# Altium PCB PCB1.PcbDoc
Units mil, origin at the board's own origin, x right, y up, seen from the top; angles counter-clockwise.
Board outline 1968.5 x 1968.5 mil, 2 copper layers (Top Layer, Bottom Layer); 15 components, 16 nets, 48 pads, 0 vias.
Unrouted connection lines stored in the file: 34.
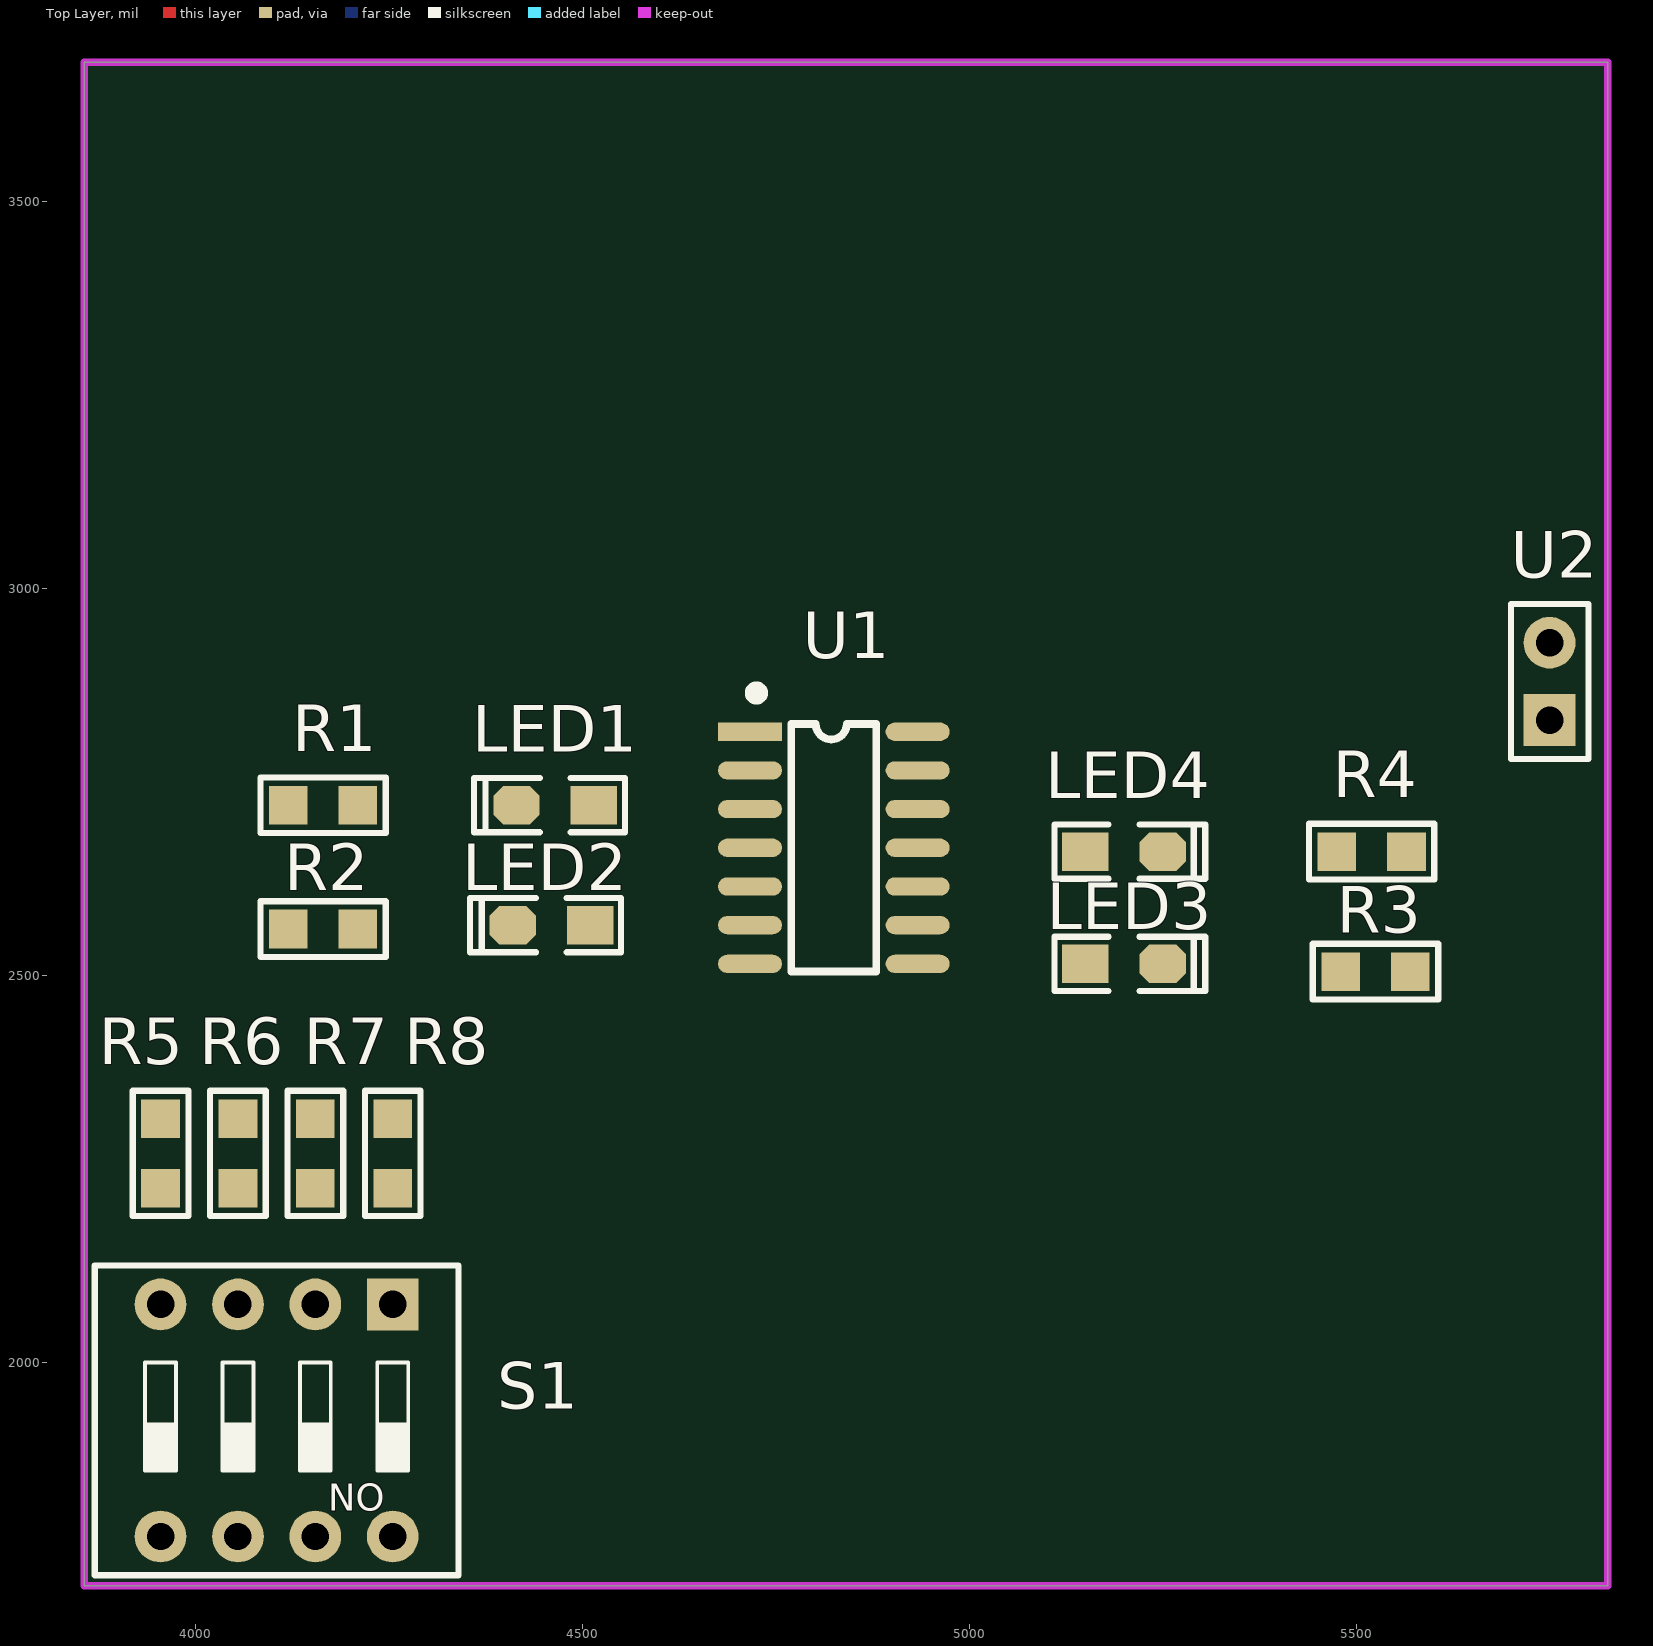
[diagram p0: Top Layer view]
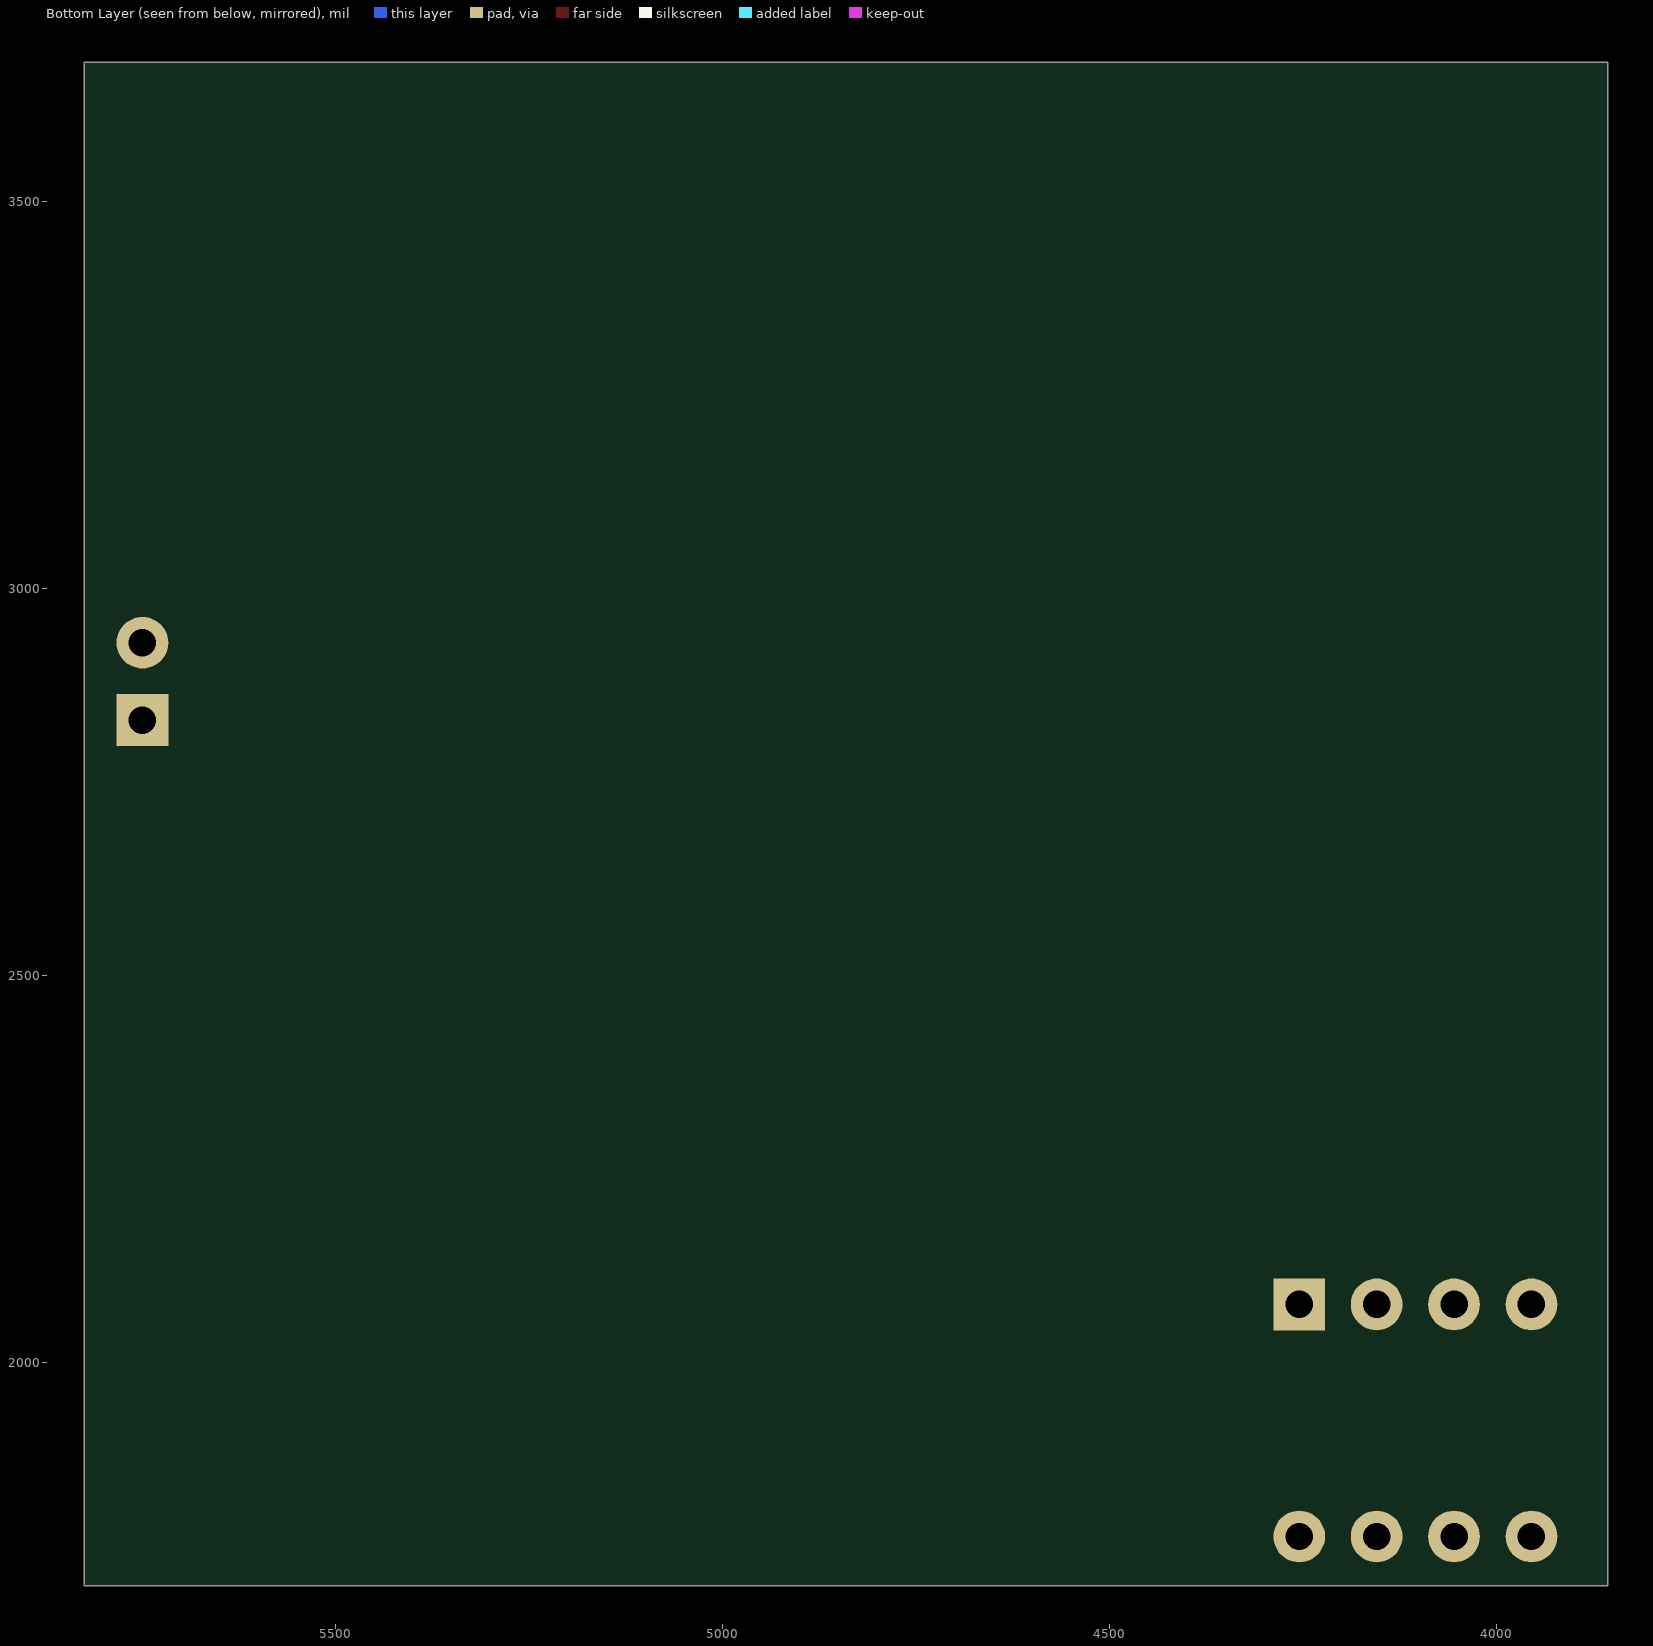
[diagram p1: Bottom Layer view, seen from below]

## Layer stack, top to bottom
Top Solder: solder mask 0.4, Solder Resist, Dk 3.5
Top Layer: signal copper 1.4
Dielectric 1: dielectric 12.6, FR-4, Dk 4.8
Bottom Layer: signal copper 1.4
Bottom Solder: solder mask 0.4, Solder Resist, Dk 3.5

## Board outline
3856.5,1711.5 3856.5,3680 5825,3680 5825,1711.5

## Design rules (kind name [scope] priority, off if disabled: settings)
Clearance [All] p1: gap=10 ignorepadtopadclearanceinfootprint=FALSE except(0: Arc-Hole Track-Hole SMDPad-Hole THPad-Hole Via-Hole Fill-Hole Poly-Hole Region-Hole Text-Hole)
PolygonConnect [All] p1: connectstyle=Relief reliefconductorwidth=10 reliefentries=4 polygonreliefangle="90 Angle" airgapwidth=10
RoutingVias [All] p1: holewidth=28 width=50 viastyle="Through Hole" minholewidth=28 minwidth=50 maxholewidth=28 maxwidth=50
SolderMaskExpansion [All] p1: expansion=4
Width POWER [InNet('VDD')] p1: maxlimit=22 minlimit=22 preferedwidth=22
Width Signal [All] p2: maxlimit=10 minlimit=10 preferedwidth=10
30 further rules are at their usual default settings.

## Components (designator, comment, footprint, x,y, rotation, side; value= is the part's Value field where it differs from the comment)
LED1 "LED_green" "LED 0805B" 4465,2720 r180 top
LED2 "LED_green" "LED 0805B" 4460,2565 r180 top
LED3 "LED_orange" "LED 0805B" 5200,2515 r0 top
LED4 "LED_red" "LED 0805B" 5200,2660 r0 top
R1 "3k" "R 0805_M" 4165,2720 r180 top (schematic designator R2)
R2 "3k" "R 0805_M" 4165,2560 r180 top
R3 "3k" "R 0805_M" 5525,2505 r0 top
R4 "3k" "R 0805_M" 5520,2660 r0 top
R5 "10k" "R 0805_M" 3955,2270 r90 top
R6 "10k" "R 0805_M" 4055,2270 r90 top
R7 "10k" "R 0805_M" 4155,2270 r90 top
R8 "10k" "R 0805_M" 4255,2270 r90 top
S1 "DIPSW4" "CSW DIP-4P" 4105,1925 r180 top
U1 "74HC00D_4V" SOP14_M 4825,2665 r0 top
U2 "HDR1/2" HDR2.54-LI-2P 5750,2880 r90 top

## Footprints (in the part's own frame and the unit in brackets; to place one, negate y for a bottom-side part, rotate by r counter-clockwise, add the part's x,y. Pads: shape width x height; smd on the part's side, far side on the other; paste and mask are expansions set on the pad)
"CSW DIP-4P" [mm] "11.7*9.9*7mm"
  rect 1.7x1.7 hole 0.9: 1(-3.81,-3.81)
  round 1.7 hole 0.9: 2(-1.27,-3.81) 3(1.27,-3.81) 4(3.81,-3.81) 5(3.81,3.81) 6(1.27,3.81) 7(-1.27,3.81) 8(-3.81,3.81)
  silkscreen extent -5.97,-5.08 5.97,5.08, body extent -5.86,-4.95 5.86,4.95, height 6.65
HDR2.54-LI-2P [mm] "排针，2脚"
  rect 1.7x1.7 hole 0.9: 1(-1.27,0)
  round 1.7 hole 0.9: 2(1.27,0)
  silkscreen extent -2.54,-1.27 2.54,1.27, body extent -2.54,-1.27 2.54,1.27, height 8.5
"LED 0805B" [mil] "蓝色0805LED"
  rect 60x50 smd: 1(-50,0)
  oct 60x50 smd: 2(50,0)
  silkscreen extent -90,-35 105,35, body extent -39,-25 39,25, height 32
"R 0805_M" [mil] "1/8W贴片电阻"
  rect 50x50 smd: 1(-45,0) 2(45,0)
  silkscreen extent -81,-36 81,36, body extent -39,-25 39,25, height 20
SOP14_M [mm] "8.7*6.2*1.8mm（长宽高）"
  rect 2.1x0.6 smd: 1(-2.75,3.81)
  oval 2.1x0.6 smd: 2(-2.75,2.54) 3(-2.75,1.27) 4(-2.75,0) 5(-2.75,-1.27) 6(-2.75,-2.54) 7(-2.75,-3.81) 8(2.75,-3.81) 9(2.75,-2.54) 10(2.75,-1.27) 11(2.75,0) 12(2.75,1.27) 13(2.75,2.54) 14(2.75,3.81)
  silkscreen extent -2.67,-4.06 1.4,5.21, body extent -3,-4.35 3,4.35, height 1.9

## Nets (pads, with @x,y where several pads share a name; then routed paths per layer and width w, separated by ;. In a path a pad name is that pad's centre, name@x,y a point inside that pad or via, vN(x,y) a via of type N, cw(c..) or ccw(c..) an arc to the next point about the centre after c; other vN are vias at no path point)
0: R1.2 R2.2 R3.2 R4.2 R5.2 R6.2 R7.2 R8.2 U1.7 U2.2
1: R6.1 S1.3 U1.10
2: R8.1 S1.1 U1.2
3: R7.1 S1.2 U1.5
4: R5.1 S1.4 U1.13
5: LED1.1 U1.3
6: LED2.1 U1.6
7: LED3.1 U1.8
8: LED4.1 U1.11
9: LED1.2 R1.1
10: LED2.2 R2.1
11: LED3.2 R3.1
12: LED4.2 R4.1
GND: 
VCC: 
VDD: S1.5 S1.6 S1.7 S1.8 U1.1 U1.4 U1.9 U1.12 U1.14 U2.1

## Keep-outs
Top Layer:
  the board outline again, w10

## Text inside footprints (layer, text, board x,y; h text height)
S1: Top Overlay "ON" at 4245,1855 h60 r180